# EAGLE board cardpov_v1r0 (EAGLE 5.10)
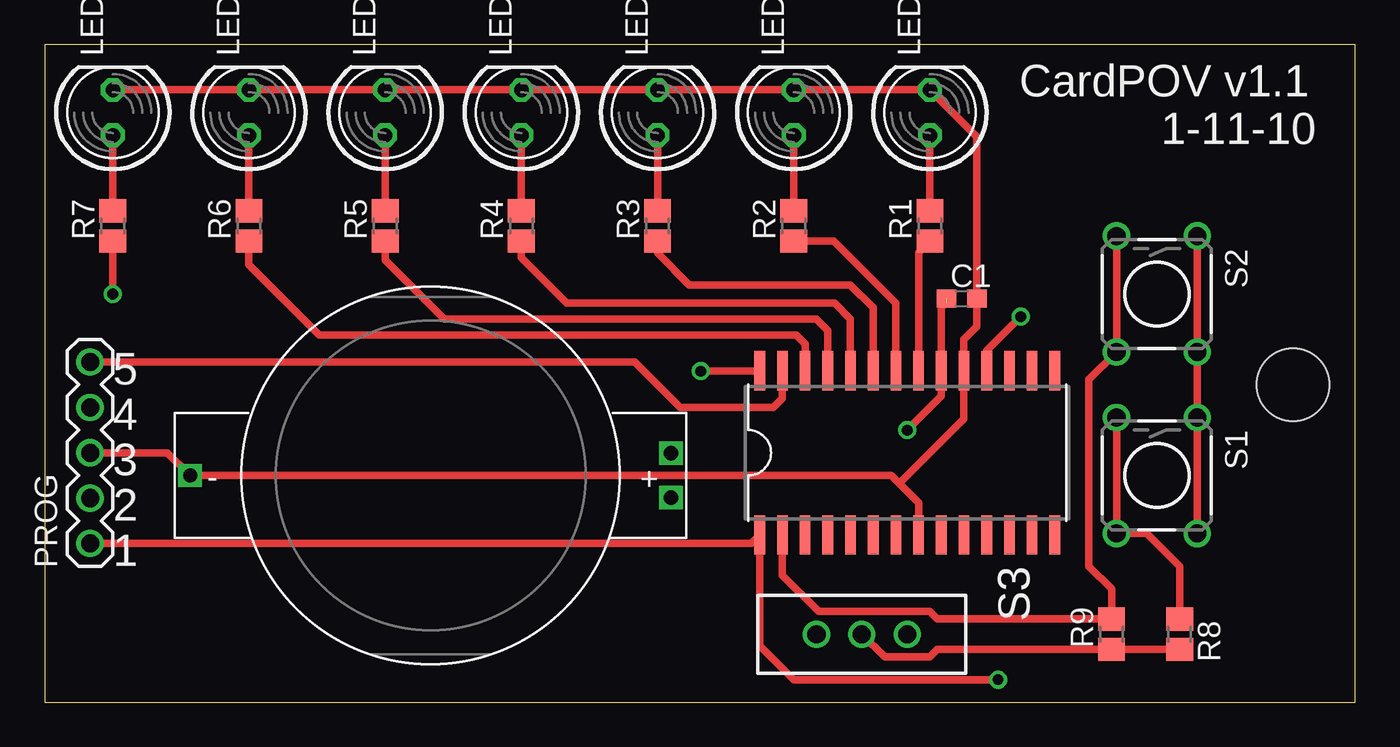
[diagram p0: board, top side]
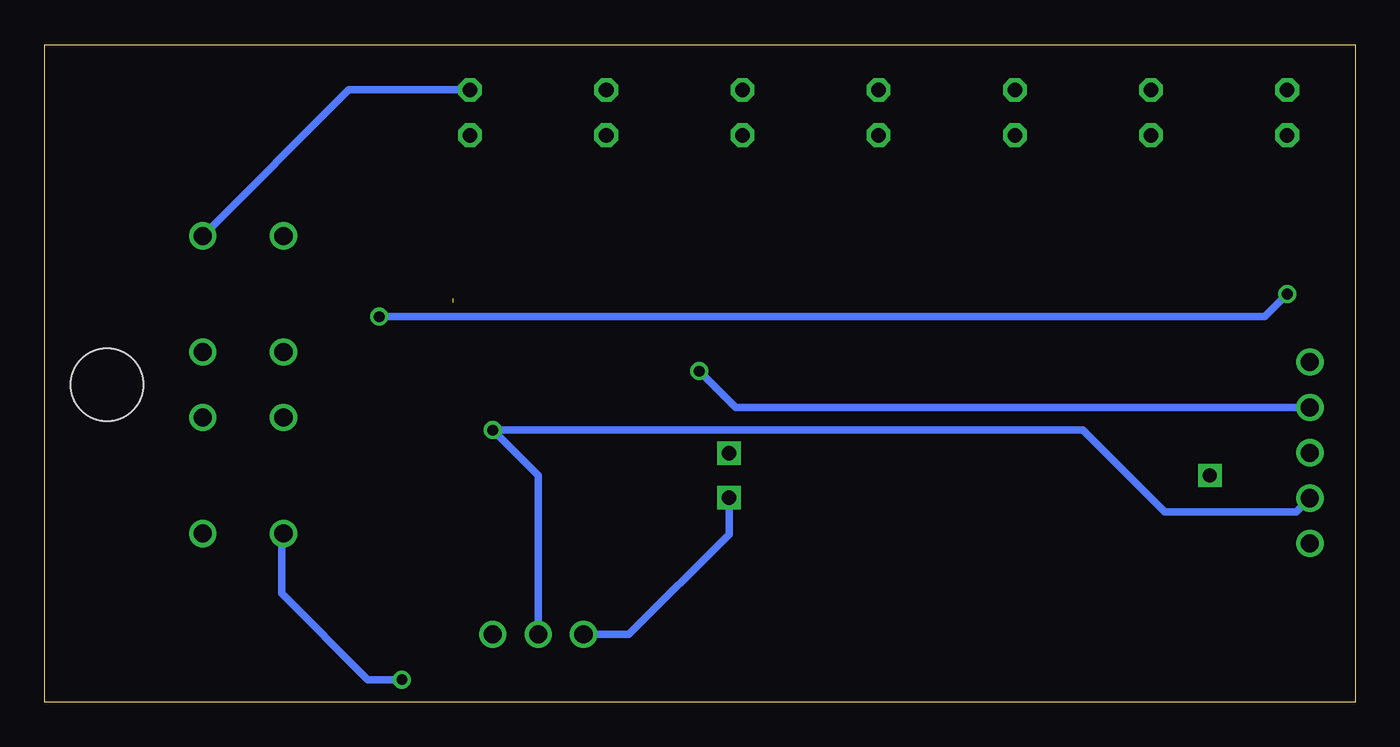
[diagram p1: board, bottom side, seen from below]

Size 73.33 x 36.82 mm. Coordinates in mm from the lower left corner, seen from the top.
Outline: 0,0 73.33,0 73.33,36.82 0,36.82 0,0
Copper layers (1*16): Top 0.035mm / dielectric 1.5mm / Bottom 0.035mm
Design rules "default": minimum track width 10mil, minimum drill 24mil, track to track 8mil, track to pad 8mil, pad to pad 8mil, via to via 8mil, smd to smd 8mil, copper to edge 40mil, drill to drill 8mil, minimum pad ring 10mil, minimum via ring 8mil, stop-mask expansion 4mil, vias tented up to drill 0mil, thermal gap 10mil
Holes 4.06 mm at 69.85,17.78

## Footprints (pad centres in the part's own frame; a part is rotated, then mirrored left to right if it is on the bottom)
C0603 = smd 1.1 x 1: 1 -0.85,0; 2 0.85,0
LED5MM = drill 0.813 octagon: A -1.27,0; K 1.27,0
1X05 = drill 1.016 round: 1 0,0; 2 2.54,0; 3 5.08,0; 4 7.62,0; 5 10.16,0
R0805 = smd 1.3 x 1.5: 1 -0.85,0; 2 0.85,0
TACTILE-PTH = drill 1.016 round: 1 -3.251,2.261; 2 3.251,2.261; 3 -3.251,-2.261; 4 3.251,-2.261
SWITCH-SPDT = drill 1.016 round: 1 0,2.54; 2 0,0; 3 0,-2.54
SOIC_28 = smd 0.6 x 2.2: 1 -8.255,-4.6; 2 -6.985,-4.6; 3 -5.715,-4.6; 4 -4.445,-4.6; 5 -3.175,-4.6; 6 -1.905,-4.6; 7 -0.635,-4.6; 8 0.635,-4.6; 9 1.905,-4.6; 10 3.175,-4.6; 11 4.445,-4.6; 12 5.715,-4.6; 13 6.985,-4.6; 14 8.255,-4.6; 15 8.255,4.6; 16 6.985,4.6; 17 5.715,4.6; 18 4.445,4.6; 19 3.175,4.6; 20 1.905,4.6; 21 0.635,4.6; 22 -0.635,4.6; 23 -1.905,4.6; 24 -3.175,4.6; 25 -4.445,4.6; 26 -5.715,4.6; 27 -6.985,4.6; 28 -8.255,4.6
BATT_HOLDER = drill 0.8 square: GND 13.45,0; P$4 -13.45,-1.25; PWR -13.45,1.25

## Placement (x,y rotation side)
C1  0.01uF  [C0603]  51.31,22.61 0 top
LED1  [LED5MM]  49.53,33.02 90 top
LED2  [LED5MM]  41.91,33.02 90 top
LED3  [LED5MM]  34.29,33.02 90 top
LED4  [LED5MM]  26.67,33.02 90 top
LED5  [LED5MM]  19.05,33.02 90 top
LED6  [LED5MM]  11.43,33.02 90 top
LED7  [LED5MM]  3.81,33.02 90 top
PROG  [1X05]  2.54,8.89 90 top
R1  75  [R0805]  49.53,26.67 90 top
R2  75  [R0805]  41.91,26.67 90 top
R3  75  [R0805]  34.29,26.67 90 top
R4  75  [R0805]  26.67,26.67 90 top
R5  75  [R0805]  19.05,26.67 90 top
R6  75  [R0805]  11.43,26.67 90 top
R7  75  [R0805]  3.81,26.67 90 top
R8  10k  [R0805]  63.5,3.81 270 top
R9  10k  [R0805]  59.69,3.81 90 top
S1  [TACTILE-PTH]  62.23,12.7 270 top
S2  [TACTILE-PTH]  62.23,22.86 270 top
S3  [SWITCH-SPDT]  45.72,3.81 270 top
U$1  PIC18F25J50  [SOIC_28]  48.26,13.97 0 top
V1  CR2032_HOLDER  [BATT_HOLDER]  21.59,12.7 180 top

## Library data of the parts
C1 = rcl
LED1-LED7 = led
PROG S1-S3 = SparkFun
R1-R9 = resistor
U$1 V1 = NBitWonder

## Nets
MCLR: PROG.1 R8.1 S1.3 S1.4 U$1.1
N$1: LED1.A R1.2
N$2: LED2.A R2.2
N$3: R9.2 S2.3 S2.4 U$1.2
N$4: LED3.A R3.2
N$5: LED4.A R4.2
N$6: LED5.A R5.2
N$7: LED6.A R6.2
N$8: LED7.A R7.2
N$9: R7.1 U$1.18
N$10: R1.1 U$1.21
N$11: R2.1 U$1.22
N$12: R3.1 U$1.23
N$13: R4.1 U$1.24
N$14: R5.1 U$1.25
N$15: R6.1 U$1.26
PGC: PROG.5 U$1.27
PGD: PROG.4 U$1.28
SW: S3.3 V1.PWR
VDD: C1.1 PROG.2 R8.2 R9.1 S3.2 U$1.20
VSS: C1.2 LED1.K LED2.K LED3.K LED4.K LED5.K LED6.K LED7.K PROG.3 S1.1 S1.2 S2.1 S2.2 U$1.8 U$1.19 V1.GND

## Tracks (layer width: path | path; a pad name or v marks a point on that pad's centre or on a via)
MCLR  (via drill 0.6)
  Top 0.406: R8.1 63.5,7.62 61.67,9.45 S1.4 S1.3 | PROG.1 39.52,8.89 U$1.1 40.01,3.17 41.91,1.27 v53.34,1.27
  Bottom 0.406: v53.34,1.27 55.24,1.27 60.07,6.1 60.07,9.35 S1.4
N$1
  Top 0.406: LED1.A R1.2
N$2
  Top 0.406: R2.2 LED2.A
N$3
  Top 0.406: S2.3 S2.4 58.42,18.06 58.42,7.62 59.69,6.35 R9.2 49.95,4.66 49.53,5.08 43.31,5.08 41.27,7.11 U$1.2
N$4
  Top 0.406: R3.2 LED3.A
N$5
  Top 0.406: R4.2 LED4.A
N$6
  Top 0.406: R5.2 LED5.A
N$7
  Top 0.406: R6.2 LED6.A
N$8
  Top 0.406: R7.2 LED7.A
N$9  (via drill 0.6)
  Top 0.406: U$1.18 52.7,19.68 v54.61,21.59 | v3.81,22.86 R7.1
  Bottom 0.406: v54.61,21.59 5.08,21.59 v3.81,22.86
N$10
  Top 0.406: U$1.21 48.9,25.18 R1.1
N$11
  Top 0.406: R2.1 44.16,25.82 47.62,22.35 U$1.22
N$12
  Top 0.406: U$1.23 46.35,22.1 45.09,23.37 36.07,23.37 34.29,25.15 R3.1
N$13
  Top 0.406: U$1.24 45.09,21.46 44.2,22.35 29.21,22.35 26.67,24.89 R4.1
N$14
  Top 0.406: U$1.25 43.81,20.83 43.18,21.46 22.35,21.46 19.05,24.77 R5.1
N$15
  Top 0.406: U$1.26 42.55,20.07 42.04,20.57 15.37,20.57 11.43,24.51 R6.1
PGC
  Top 0.406: PROG.5 33.02,19.05 35.56,16.51 40.77,16.51 41.27,17.02 U$1.27
PGD  (via drill 0.6)
  Top 0.406: v36.7,18.54 39.98,18.54 U$1.28
  Bottom 0.406: PROG.4 34.67,16.51 v36.7,18.54
SW
  Bottom 0.406: V1.PWR 35.04,9.41 40.64,3.81 S3.3
VDD  (via drill 0.6)  (1 unrouted)
  Top 0.406: v48.26,15.24 50.16,17.14 U$1.20 50.16,22.1 50.46,22.39 | R8.2 R9.1 49.95,2.96 49.53,2.54 46.99,2.54 S3.2
  Bottom 0.406: S3.2 45.72,12.7 v48.26,15.24 15.24,15.24 10.67,10.67 3.3,10.67 PROG.2
VSS
  Top 0.406: PROG.3 6.87,13.97 V1.GND 47.37,12.7 47.82,12.26 | 47.82,12.26 48.9,11.18 U$1.8 | 47.82,12.26 51.44,15.88 U$1.19 51.44,20.32 52.16,21.04 C1.2 52.16,31.66 LED1.K LED2.K LED3.K LED4.K LED5.K LED6.K LED7.K | S2.1 S2.2 S1.1 S1.2
  Bottom 0.406: LED1.K 56.31,34.29 S2.1

## Text on the board
tPlace: CardPOV v1.1 | 1-11-10 | 5 | 4 | 3 | 2 | 1